# Altium PCB Yusynth VCA.PcbDoc
Units mil, origin at the board's own origin, x right, y up, seen from the top; angles counter-clockwise.
Board outline 1615 x 1261.46 mil, 2 copper layers (Top Layer, Bottom Layer); 40 components, 26 nets, 96 pads, 17 vias.
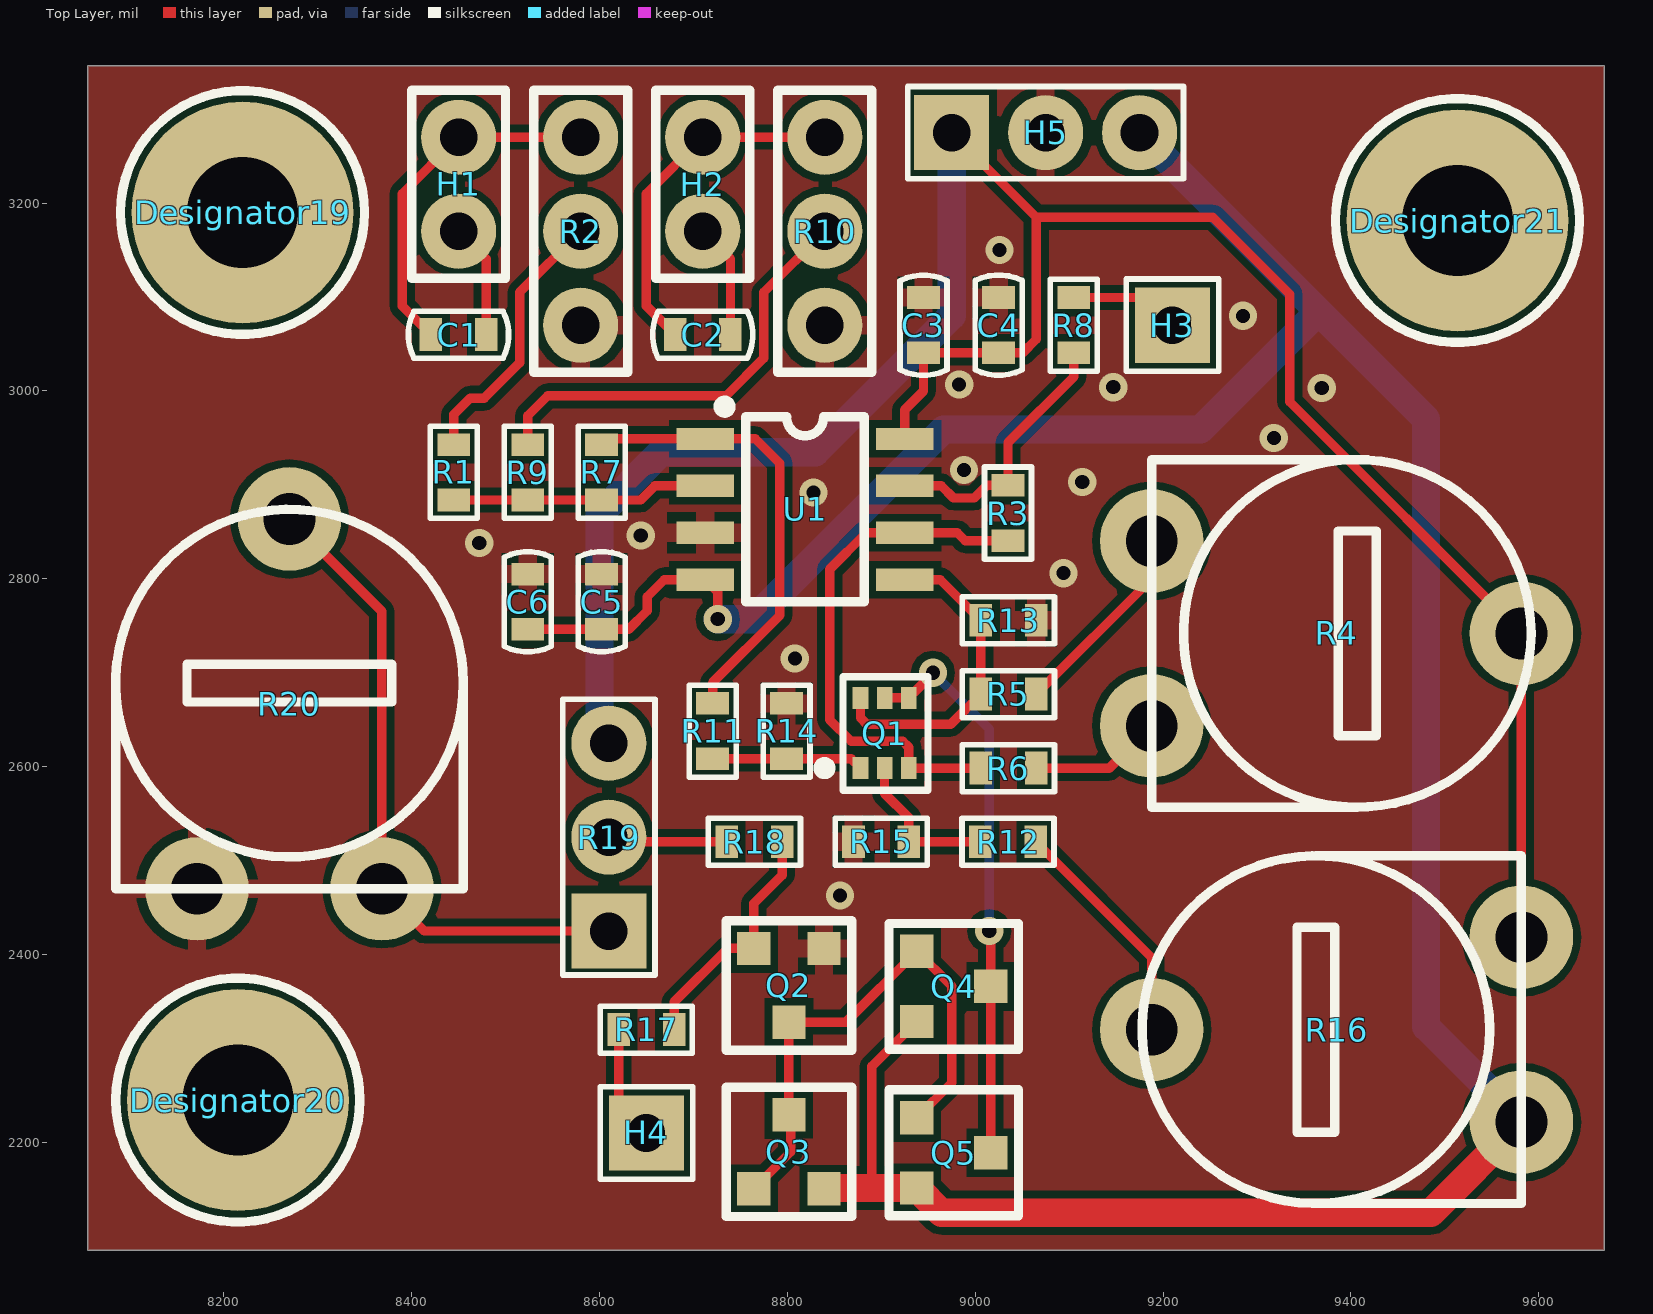
[diagram p0: Top Layer view]
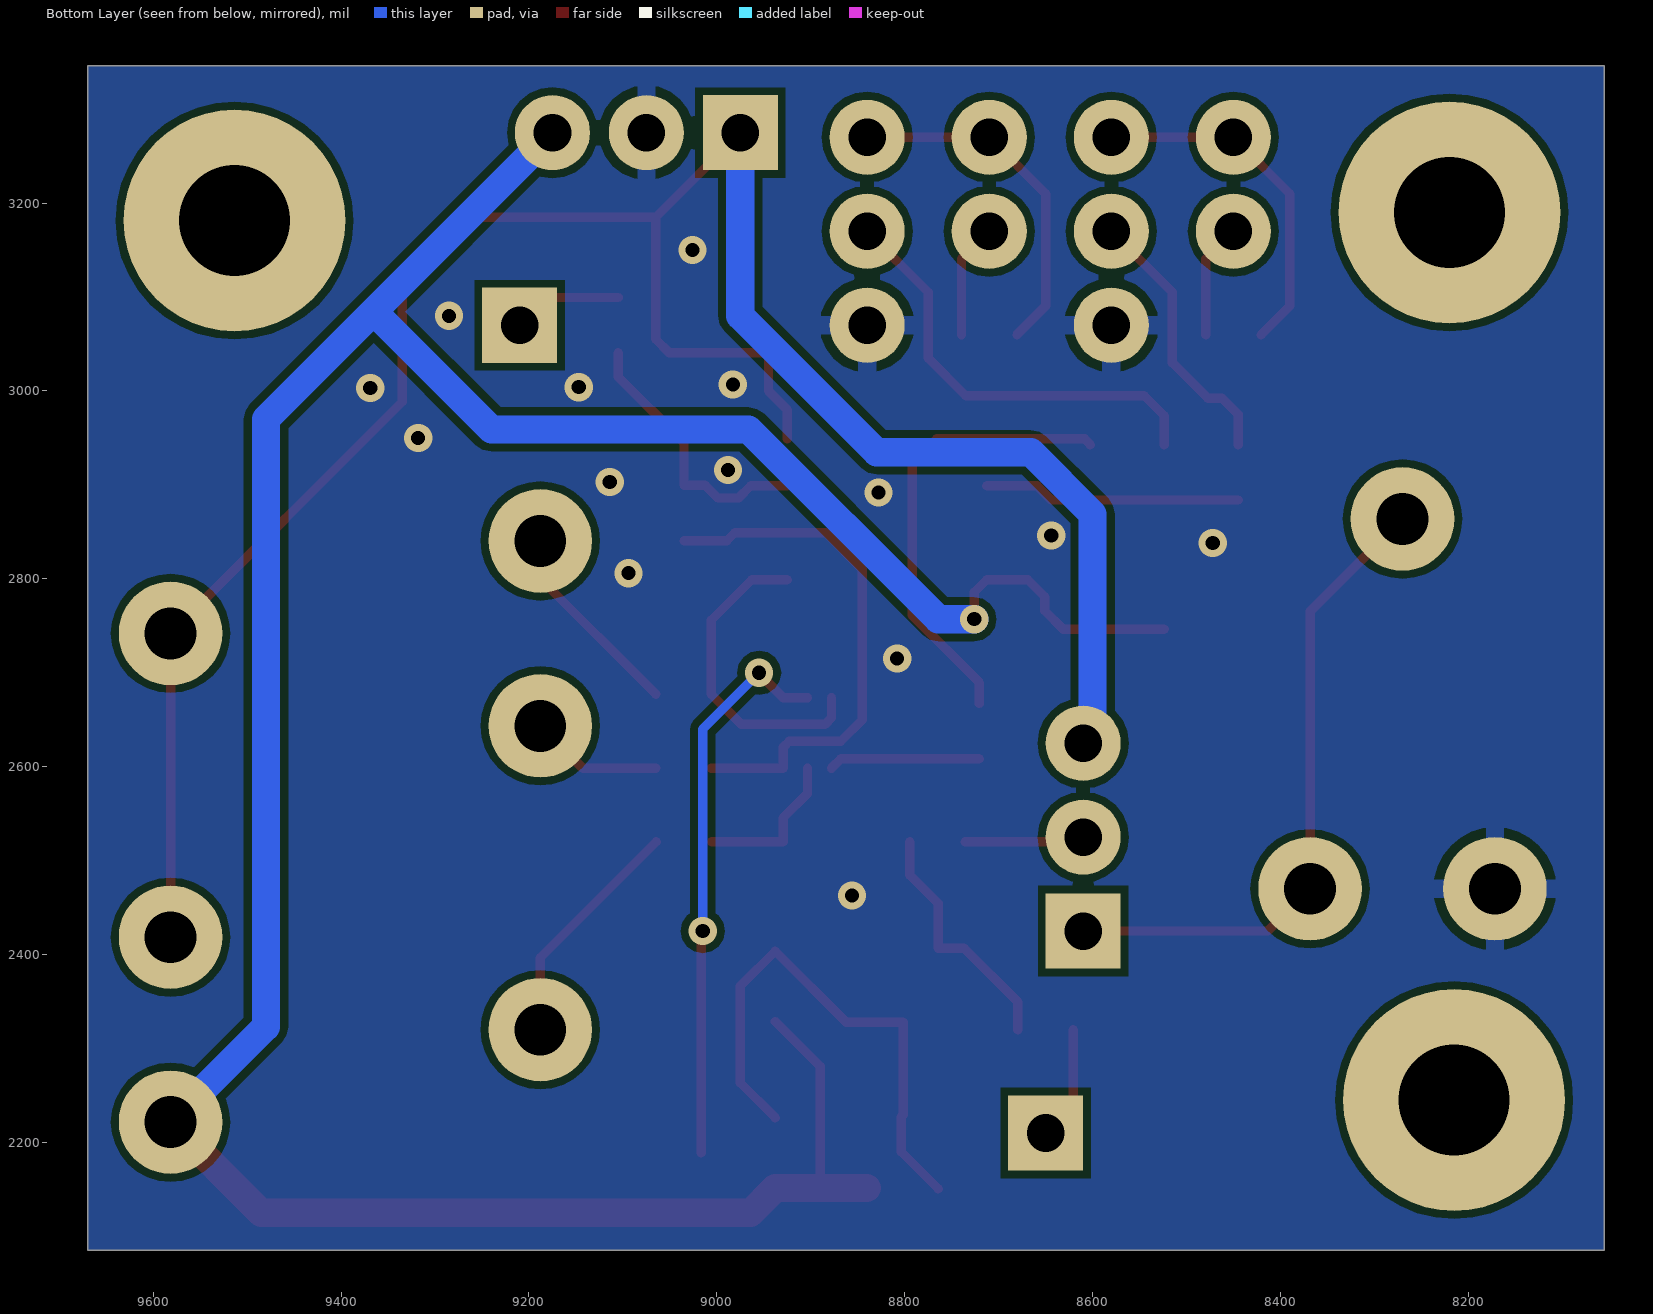
[diagram p1: Bottom Layer view, seen from below]
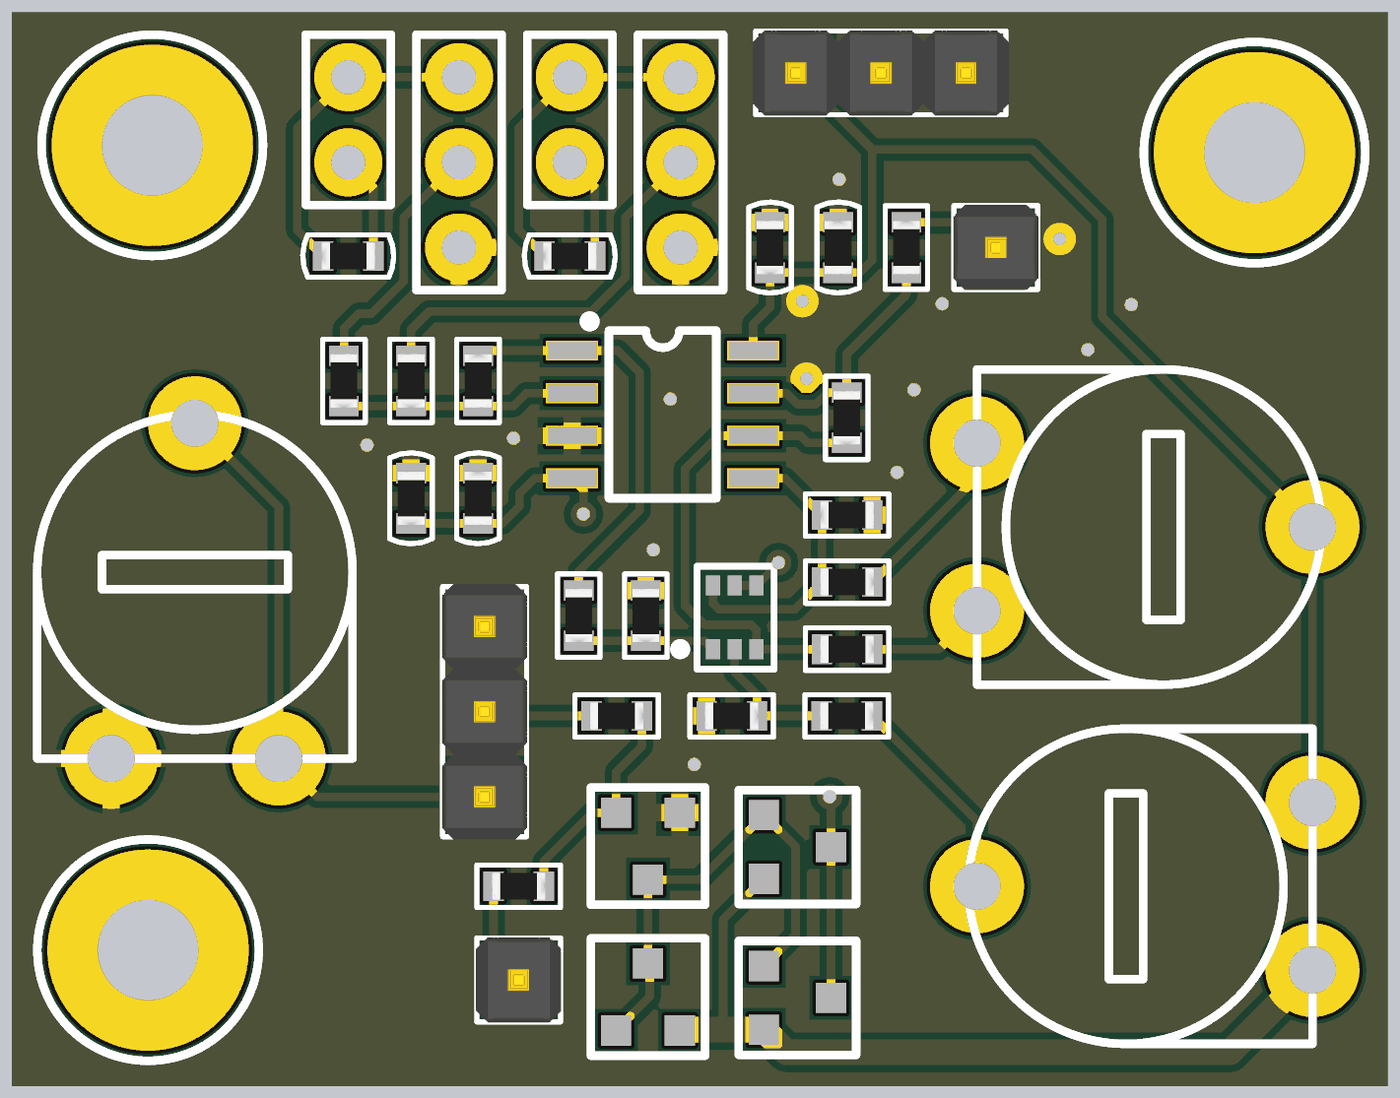
[diagram p2: 3D render of the assembled board from above, using the file's embedded part models]

## Layer stack, top to bottom
Top Solder: solder mask 0.4, Solder Resist, Dk 3.5
Top Layer: signal copper 1.4
Dielectric 1: dielectric 12.6, FR-4, Dk 4.8
Bottom Layer: signal copper 1.4
Bottom Solder: solder mask 0.4, Solder Resist, Dk 3.5

## Board outline
8055,2085 9670,2085 9670,3346.46 8055,3346.46

## Design rules (kind name [scope] priority, off if disabled: settings)
Clearance [All] p1: gap=8
Height [All] p1: minheight=0 maxheight=10000 prefheight=500
PlaneConnect [All] p1: planeconnectstyle=Relief reliefexpansion=20 reliefentries=4 reliefconductorwidth=20 reliefairgap=10
PolygonConnect PolygonConnect_Vias [All vs isVia] p1: connectstyle=Direct reliefconductorwidth=10 reliefentries=4 polygonreliefangle="90 Angle" airgapwidth=10
PolygonConnect [All] p2: connectstyle=Relief reliefconductorwidth=20 reliefentries=4 polygonreliefangle="90 Angle" airgapwidth=10
RoutingVias [All] p1: holewidth=15 width=30 viastyle="Through Hole" minholewidth=10 minwidth=20 maxholewidth=100 maxwidth=200
SolderMaskExpansion [All] p1: expansion=4
Width [All] p1: maxlimit=100 minlimit=10 preferedwidth=10
28 further rules are at their usual default settings.

## Components (designator, comment, footprint, x,y, rotation, side; value= is the part's Value field where it differs from the comment)
C1 "100nF" "JEDEC - 0603 - cap" 8450,3060 r180 top
C2 "100nF" "JEDEC - 0603 - cap" 8710,3060 r180 top
C3 "100nF" "JEDEC - 0603 - cap" 8945,3070 r270 top
C4 "1u" "JEDEC - 0603 - cap" 9025,3070 r90 top
C5 "100nF" "JEDEC - 0603 - cap" 8602.36,2775.59 r90 top
C6 "1u" "JEDEC - 0603 - cap" 8523.62,2775.59 r270 top
Designator19 "Comment" "g - standoff M3" 8220,3190 r0 top
Designator20 "Comment" "g - standoff M3" 8215,2245 r0 top
Designator21 "Comment" "g - standoff M3" 9513.54,3181.46 r270 top
H1 "2" "H - 100MIL - 1x2" 8450,3220 r90 top
H2 "2" "H - 100MIL - 1x2" 8710,3220 r90 top
H3 "1x1" "H - 100MIL - 1x1" 9210,3070 r270 top
H4 "1x1" "H - 100MIL - 1x1" 8650,2210 r180 top
H5 "1x3" "H - 100MIL - 1x3"#1 9075,3275 r0 top
Q1 "DMMT3904W" "Diodes Inc - SOT363" 8877.95,2598.43 r90 top
Q2 "MMBT3906" "SOT 23" 8801.73,2367.13 r180 top
Q3 "MMBT3904" "SOT 23" 8801.73,2189.96 r0 top
Q4 "MMBT3904" "SOT 23" 8977.2,2366.1 r270 top
Q5 "MMBT3904" "SOT 23" 8977.2,2188.94 r270 top
R1 "100k" "JEDEC - 0603" 8444.88,2913.39 r270 top
R2 "47k log" "H - 100MIL - 1x3"#2 8580,3070 r90 top
R3 "130k" "JEDEC - 0603" 9035,2870 r270 top
R4 "5k" "POT - CTS - 262 Series" 9187.91,2741.85 r270 top
R5 "47k" "JEDEC - 0603" 9035.43,2677.17 r0 top
R6 "47k" "JEDEC - 0603" 9035.43,2598.43 r0 top
R7 "100k" "JEDEC - 0603" 8602.36,2913.39 r90 top
R8 "1k" "JEDEC - 0603" 9105,3070 r90 top
R9 "100k" "JEDEC - 0603" 8523.62,2913.39 r270 top
R10 "47k log" "H - 100MIL - 1x3"#2 8840,3070 r90 top
R11 "100k" "JEDEC - 0603" 8720.47,2637.8 r270 top
R12 "1M" "JEDEC - 0603" 9035,2520 r0 top
R13 "130k" "JEDEC - 0603" 9035.43,2755.91 r180 top
R14 "220R" "JEDEC - 0603" 8799.21,2637.8 r270 top
R15 "220R" "JEDEC - 0603" 8900,2520 r0 top
R16 "100k" "POT - CTS - 262 Series" 9581.61,2320 r90 top
R17 "100k" "JEDEC - 0603" 8650,2320 r0 top
R18 "100k" "JEDEC - 0603" 8765,2520 r0 top
R19 "47k lin" "H - 100MIL - 1x3"#1 8610,2525 r90 top
R20 "5k" "POT - CTS - 262 Series" 8270,2470 r0 top
U1 "TL052" "TI - D (R-PDSO-G8)" 8818.9,2874.02 r0 top

## Footprints (in the part's own frame and the unit in brackets; to place one, negate y for a bottom-side part, rotate by r counter-clockwise, add the part's x,y. Pads: shape width x height; smd on the part's side, far side on the other; paste and mask are expansions set on the pad)
"Diodes Inc - SOT363" [mm]
  rect 0.6x0.42 smd mask+0: 1(0,0) 2(0,-0.65) 3(0,-1.3) 4(1.9,-1.3) 5(1.9,-0.65) 6(1.9,0)
  silkscreen extent -0.6,-1.83 2.47,1.12
"g - standoff M3" [mm]
  round 6 hole 3: 0(0,0)
  silkscreen extent -3.3,-3.3 3.3,3.3
"H - 100MIL - 1x1" [mil]
  rect 80x80 hole 40: 1(0,0)
  silkscreen extent -49,-49 49,49, body extent -50,-50 50,50, height 374
"H - 100MIL - 1x2" [mil]
  round 80 hole 40: 1(-50,0) 2(50,0)
  silkscreen extent -100,-50 100,50
"H - 100MIL - 1x3"#1 [mil]
  rect 80x80 hole 40: 1(-100,0)
  round 80 hole 40: 2(0,0) 3(100,0)
  silkscreen extent -147,-49 147,49, body extent -150,-50 150,50, height 374
"H - 100MIL - 1x3"#2 [mil]
  round 80 hole 40: 1(0,0) 2(100,0) 3(200,0)
  silkscreen extent -50,-50 250,50
"JEDEC - 0603" [mil]
  rect 24x35 smd: 1(-29.5,0) 2(29.5,0)
  silkscreen extent -49,-25 49,25, body extent -31,-16 32,16
"JEDEC - 0603 - cap" [mil] "rounded edged indicate a cap"
  rect 24x35 smd: 1(-29.5,0) 2(29.5,0)
  silkscreen extent -53,-25 53,25, body extent -31,-16 32,16
"POT - CTS - 262 Series" [mm] "CTS Electrocomponents"
  round 2.8 hole 1.4: 1(-2.5,0) 2(2.5,0) 3(0,10)
  silkscreen extent -4.7,0 4.7,10.26, body extent -4.7,0 4.7,10.26, height 5.4
"SOT 23" [mm] "From On Semi MMBT3904"
  rect 0.9x0.9 smd: 1(-0.95,-1) 2(0.95,-1) 3(0,1)
  silkscreen extent -1.7,-1.75 1.7,1.75
"TI - D (R-PDSO-G8)" [mm] "http://www.ti.com/lit/ml/mpds348/mpds348.pdf"
  rect 1.55x0.6 smd paste-0.05: 1(-2.7,1.905) 2(-2.7,0.635) 3(-2.7,-0.635) 4(-2.7,-1.905) 5(2.7,-1.905) 6(2.7,-0.635) 7(2.7,0.635) 8(2.7,1.905)
  silkscreen extent -2.32,-2.5 1.6,2.92

## Part data
C1 C2 C3 C5: library part "c - 100nF", "CAP CER 0.1UF 50V X7R 0603"
C4 C6: library part "c - 1uF 50V 0603", "CAP CER 1UF 50V X5R 0603"
H1 H2: library part "Header - 1x2"
H3 H4: library part "Header - 1x1"
H5: library part "Header - 1x3"
Q1: library part "tran - matched npn - DMMT3904W", "TRANS 2NPN 40V 0.2A SOT363"
Q2: library part "tran - PNP - MMBT3906", "TRANS PNP 40V 0.2A SOT23"
Q3 Q4 Q5: library part "tran - NPN - MMBT3904", "TRANS NPN 40V 0.2A SOT23"
R1 R7 R9 R11 R17 R18: library part "R - 100k 1% 0603", "RES SMD 100K OHM 1% 1/10W 0603"
R2 R10 R19: library part "g - pot 3"
R3 R13: library part "R - 130k 1% 0603", "RES SMD 130K OHM 1% 1/10W 0603"
R4 R20: library part "pot - 262 - 5k", "TRIMMER 5K OHM 0.15W TH"
R5 R6: library part "R - 47k 1% 0603", "RES SMD 47K OHM 1% 1/10W 0603"
R8: library part "R - 1k 1% 0603", "RES SMD 1K OHM 1% 1/10W 0603"
R12: library part "R - 1M 1% 0603", "RES SMD 1M OHM 1% 1/10W 0603"
R14 R15: library part "R - 220R 1% 0603", "RES SMD 220 OHM 1% 1/10W 0603"
R16: library part "pot - 262 - 100k", "TRIMMER 100K OHM 0.15W TH"
U1: library part "op amp - TL052", "IC OPAMP JFET 3MHZ 8SOIC"

## Via types
v1: diameter 30, hole 15, Top Layer to Bottom Layer, tented both sides, 14 vias
v2: diameter 30, hole 15, Top Layer to Bottom Layer, 3 vias

## Nets (pads, with @x,y where several pads share a name; then routed paths per layer and width w, separated by ;. In a path a pad name is that pad's centre, name@x,y a point inside that pad or via, vN(x,y) a via of type N, cw(c..) or ccw(c..) an arc to the next point about the centre after c; other vN are vias at no path point)
+15V: C3.2 C4.1 H5.1 R4.3 R16.2 R19.3 U1.8 | length 2519
  Top Layer w10: U1.8 8925.2,2980.2 8945,3000 C3.2 C4.1 9050.5,3040.5 9065,3055 9065,3185 ; H5.1@8946.88,3246.88 H5.1 9065,3185 ; R16.2 R4.3 9335,2988.46 9335,3103 9253,3185 9065,3185
  Bottom Layer w30: R19.3 8600,2635 8600,2869 8665.81,2934.81 8829.81,2934.81 8975,3080 H5.1
-15V: C5.1 C6.2 H5.3 Q3.2 Q4.2 Q5.2 R16.1 U1.4 | length 3255.9
  Top Layer w10: C6.2 C5.1 8631.09,2746.09 8651,2766 8651,2781 8669.02,2799.02 U1.4 8726,2785.61 v1(8726,2757) ; Q3.2 Q3.2@8841.22,2150.59 ; 8890,2151.54 8890,2280.87 Q4.2
  Top Layer w30: Q3.2@8840.08,2151.54 8890,2151.54 Q5.2 8964.37,2125 9485.04,2125 R16.1
  Bottom Layer w30: v1(8726,2757) 8764.26,2757 8966.26,2959 9240,2959 9365.5,3084.5 ; H5.3 9480,2970 9480,2323.19 R16.1
GND: C3.1 C4.2 C5.2 C6.1 H5.2 Q2.1 R2.1 R10.1 R13.1 R14.1 R15.1 R20.1 U1.3
  other v1: 8856,2463 8808,2715 9094,2806 8472,2838 8644,2846 8828,2892 9114,2903 9318,2950 9369,3003 9147,3004 9026,3150
  other v2: 8988,2916 8983,3007 9285,3080
NetC1_1: C1.1 H1.1 | length 122.2
  Top Layer w10: H1.1 8479.5,3140.5 C1.1
NetC1_2: C1.2 H1.2 R2.3 | length 377.5
  Top Layer w10: C1.2 8390,3090.5 8390,3210 H1.2 R2.3
NetC2_1: C2.1 H2.1 | length 122.2
  Top Layer w10: H2.1 8739.5,3140.5 C2.1
NetC2_2: C2.2 H2.2 R10.3 | length 377.5
  Top Layer w10: C2.2 8650,3090.5 8650,3210 H2.2 R10.3
NetH3_1: H3.1 R8.2 | length 117.2
  Top Layer w10: R8.2 9180.5,3099.5 H3.1
NetH4_1: H4.1 R17.1 | length 122.2
  Top Layer w10: R17.1 8620.5,2239.5 H4.1
NetQ1_1: Q1.1 R11.2 R14.2 | length 161.6
  Top Layer w10: R11.2 R14.2 8868.08,2608.3 Q1.1
NetQ1_2: Q1.2 R12.1 R15.2 | length 165.2
  Top Layer w10: Q1.2 8903.54,2571.46 8929.5,2545.5 R15.2 R12.1
NetQ1_3: Q1.3 R3.2 R6.1 U1.6 | length 565.1
  Top Layer w10: R6.1 Q1.3 8929.13,2620.87 8923,2627 8868,2627 8845,2650 8845,2810 8884.02,2849.02 U1.6 8980.98,2849.02 8989.5,2840.5 R3.2
NetQ1_4: Q1.4 Q1.5 Q4.3 Q5.3 | length 599.6
  Top Layer w10: Q1.5 Q1.4 8955,2699.09 v1(8955,2700) ; v1(9015,2425) 9016.57,2423.43 Q4.3 Q5.3
  Bottom Layer w10: v1(8955,2700) 9015,2640 v1(9015,2425)
NetQ1_6: Q1.6 R5.1 R13.2 U1.5 | length 342.7
  Top Layer w10: Q1.6 8877.95,2652.05 8885,2645 8973.77,2645 R5.1 R13.2 8962.82,2799.02 U1.5
NetQ2_2: Q2.2 R17.2 R18.2 | length 263.9
  Top Layer w10: R17.2 8679.5,2349.5 8736.5,2406.5 Q2.2 8764.33,2454.33 8794.5,2484.5 R18.2
NetQ2_3: Q2.3 Q3.1 Q3.3 Q4.1 Q5.1 | length 569.8
  Top Layer w10: Q3.1 8803.74,2190 8803.74,2227.32 Q3.3 Q2.3 8862.09,2327.76 Q4.1 8975,2366.34 8975,2263.5 Q5.1
NetR1_1: R1.1 R2.2 | length 291.9
  Top Layer w10: R1.1 8444.88,2974.88 8462.41,2992.41 8477.41,2992.41 8515,3030 8515,3105 R2.2
NetR1_2: R1.2 R7.1 R9.2 U1.2 | length 274
  Top Layer w10: R1.2 R9.2 R7.1 8643.89,2883.89 8659.02,2899.02 U1.2
NetR3_1: R3.1 R8.1 U1.7 | length 290.8
  Top Layer w10: U1.7 8963.95,2899.02 8976.96,2886 8999,2886 9012.5,2899.5 R3.1 9035,2945 9105,3015 R8.1
NetR4_1: R4.1 R5.2 | length 214.1
  Top Layer w10: R5.2 9187.91,2800.15 R4.1
NetR4_2: R4.2 R6.2 | length 141.6
  Top Layer w10: R6.2 9142.91,2598.43 R4.2
NetR7_2: R7.2 R11.1 U1.1 | length 488.3
  Top Layer w10: R7.2 8608.49,2949.02 U1.1 8765.98,2949.02 8792,2923 8792,2761 8720.47,2689.47 R11.1
NetR9_1: R9.1 R10.2 | length 469.5
  Top Layer w10: R9.1 8523.62,2973.62 8545,2995 8735,2995 8775,3035 8775,3105 R10.2
NetR12_2: R12.2 R16.3 | length 251.1
  Top Layer w10: R12.2 9187.91,2396.59 R16.3
NetR18_1: R18.1 R19.2 | length 127.6
  Top Layer w10: R19.2 8615,2520 R18.1
NetR19_1: R19.1 R20.2 R20.3 | length 694.7
  Top Layer w10: R20.3 8368.43,2765.28 R20.2 8413.43,2425 R19.1
pads on no net: Designator19.0 Designator20.0 Designator21.0

## Polygon pours and split planes (outlines as drawn)
GND on Top Layer "TopGnd" (solid, pour order 1): 8055,2085 8055,3346.46 9670,3346.46 9670,2085
GND on Bottom Layer "TopGnd" (solid, pour order 2): 8055,2085 8055,3346.46 9670,3346.46 9670,2085

## Silkscreen, mask and mechanical layers (free items; w line width, h text height)
Mechanical 1:
  lines w10: 4881.89,1732.28 6850.39,1732.28 6850.39,3031.5 4881.89,3031.5 4881.89,1732.28 ; 8055,2085 8055,3346.46 9670,3346.46 9670,2085 8055,2085

## Dimensions
9670,2085 to 9670,3346.46 on Mechanical 2
9670,3346.46 to 8055,3346.46 on Mechanical 2